# Altium PCB PCB - Christopher.PcbDoc
Units mil, origin at the board's own origin, x right, y up, seen from the top; angles counter-clockwise.
Board outline 6000 x 4000 mil, 2 copper layers (Top Layer, Bottom Layer); 65 components, 42 nets, 221 pads, 0 vias.
Unrouted connection lines stored in the file: 113.
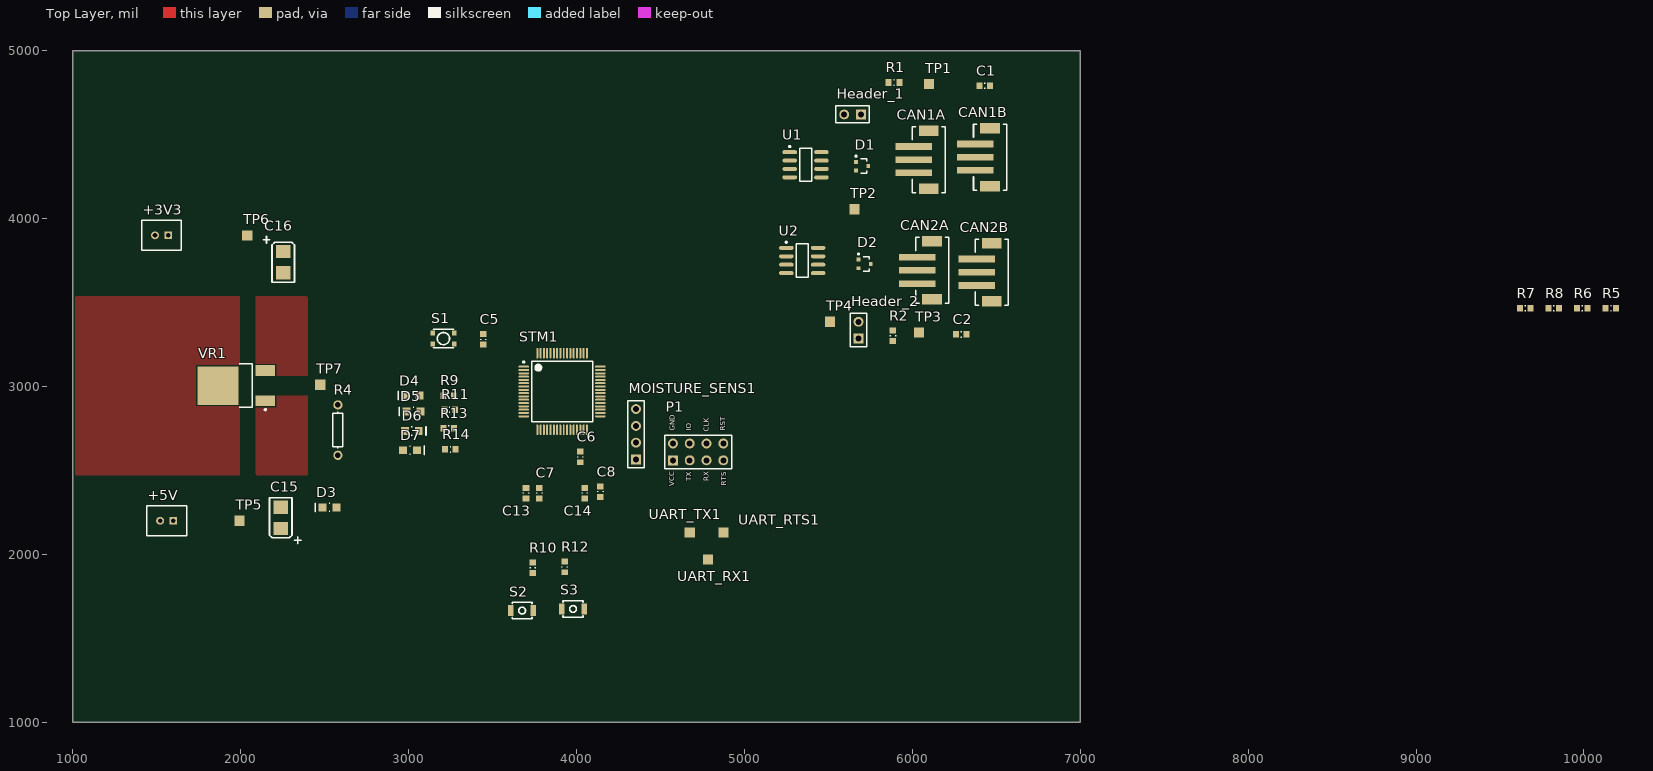
[diagram p0: Top Layer view]
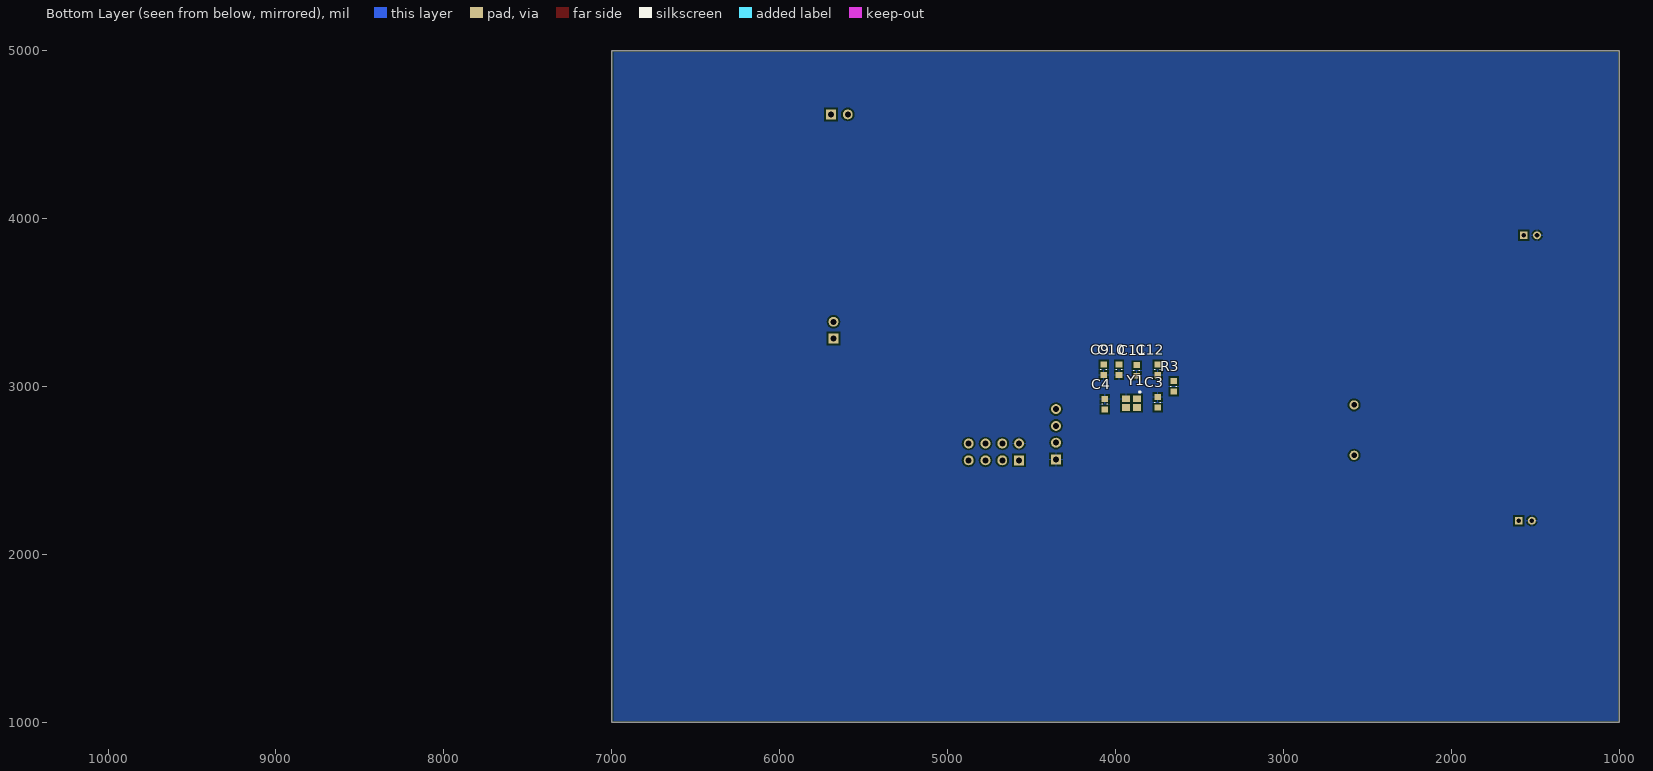
[diagram p1: Bottom Layer view, seen from below]

## Layer stack, top to bottom
Top Solder: solder mask 0.4, Solder Resist, Dk 3.5
Top Layer: signal copper 1.4
Dielectric 1: dielectric 12.6, FR-4, Dk 4.8
Bottom Layer: signal copper 1.4
Bottom Solder: solder mask 0.4, Solder Resist, Dk 3.5

## Board outline
1000,1000 7000,1000 7000,5000 1000,5000

## Design rules (kind name [scope] priority, off if disabled: settings)
BoardOutlineClearance [All] p1: gap=10 ignorepadtopadclearanceinfootprint=FALSE except(0: Arc-SplitContinuation Track-SplitContinuation SMDPad-SplitContinuation THPad-SplitContinuation Via-SplitContinuation Fill-SplitContinuation Poly-SplitContinuation Region-SplitContinuation Text-SplitContinuation)
Clearance [All] p1: gap=10 ignorepadtopadclearanceinfootprint=FALSE except(0: Arc-Hole Track-Hole SMDPad-Hole THPad-Hole Via-Hole Fill-Hole Poly-Hole Region-Hole Text-Hole; 5: SMDPad-SMDPad; 6: Arc-Arc Arc-Track Arc-SMDPad Track-Track Track-SMDPad)
PolygonConnect [All] p1: connectstyle=Relief reliefconductorwidth=10 reliefentries=4 polygonreliefangle="90 Angle" airgapwidth=10
RoomDefinition Support [InComponentClass('Support')] p1: confinementstyle=ConfineIn formatcopy=TRUE lockcomponents=FALSE outline 7045,3365 11820,3365 11820,3605 7045,3605
RoomDefinition POWER [InComponentClass('POWER')] p2: confinementstyle=ConfineIn formatcopy=TRUE lockcomponents=FALSE outline 7045,2735 8955,2735 8955,3320 7045,3320
RoomDefinition MCU [InComponentClass('MCU')] p3: confinementstyle=ConfineIn formatcopy=TRUE lockcomponents=FALSE outline 7045,2045 10425,2045 10425,2685 7045,2685
RoomDefinition Connectors [InComponentClass('Connectors')] p4: confinementstyle=ConfineIn formatcopy=TRUE lockcomponents=FALSE outline 7045,1450 10335,1450 10335,1990 7045,1990
RoomDefinition CAN [InComponentClass('CAN')] p5: confinementstyle=ConfineIn formatcopy=TRUE lockcomponents=FALSE outline 7045,1060 10655,1060 10655,1405 7045,1405
RoutingVias [All] p1: holewidth=28 width=50 viastyle="Through Hole" minholewidth=28 minwidth=50 maxholewidth=28 maxwidth=50
SolderMaskExpansion [All] p1: expansion=4
Width [All] p1: maxlimit=10 minlimit=10 preferedwidth=10
30 further rules are at their usual default settings.

## Classes and differential pairs
component class Support: D4 D5 D6 D7 R5 R6 R7 R8 R9 R10 R11 R12 R13 R14 S2 S3 UART_RTS UART_RTS1 UART_RX UART_RX1 UART_TX UART_TX1
component class Power: C15 C16 D3 R4 TP5 TP6 TP7 VR1
component class MCU: C3 C4 C5 C6 C7 C8 C13 C14 R3 S1 STM1 Y1
component class Connectors: +3V3 +5V CAN1A CAN1B CAN2A CAN2B MOISTURE_SENS1 P1
component class CAN: C1 C2 D1 D2 Header_1 Header_2 R1 R2 TP1 TP2 TP3 TP4 U1 U2

## Components (designator, comment, footprint, x,y, rotation, side; value= is the part's Value field where it differs from the comment)
+3V3 "CON_2M" JST-B2B-PHSK 1530,3900 r180 top
+5V "CON_2M" JST-B2B-PHSK 1560.63,2200 r180 top
C1 "CAP_0.1uF_16V_0603" CAPC0603(1608)55_N 6431.5,4790 r0 top value=0.1uF
C2 "CAP_0.1uF_16V_0603" CAPC0603(1608)55_N 6291.5,3310 r0 top value=0.1uF
C3 "CAP_15pF_0603" CAPC0603(1608)55_N 3750,2904.87 r270 bottom value=15pF
C4 "CAP_15pF_0603" CAPC0603(1608)55_N 4065,2894.41 r270 bottom value=15pF
C5 "CAP_0.1uF_16V_0603" CAPC0603(1608)55_N 3445,3280 r270 top value=0.1uF
C6 "CAP_4.7uF_0603" CAPC0603(1608)55_N 4023.27,2580 r90 top value=4.7uF
C7 "CAP_0.1uF_16V_0603" CAPC0603(1608)55_N 3780,2365 r90 top value=0.1uF
C8 "CAP_1uF_16V_0603" CAPC0603(1608)55_N 4143.35,2373.5 r90 top value=1uF
C9 "CAP_0.1uF_16V_0603" CAPC0603(1608)55_N 4071.73,3100 r90 bottom value=0.1uF
C10 "CAP_0.1uF_16V_0603" CAPC0603(1608)55_N 3980,3100 r90 bottom value=0.1uF
C11 "CAP_0.1uF_16V_0603" CAPC0603(1608)55_N 3875,3095 r90 bottom value=0.1uF
C12 "CAP_4.7uF_0603" CAPC0603(1608)55_N 3750,3100 r90 bottom value=4.7uF
C13 "CAP_0.1uF_16V_0603" CAPC0603(1608)55_N 3700,2365 r90 top value=0.1uF
C14 "CAP_10nF_0603" CAPC0603(1608)55_N 4050,2365 r90 top value=10nF
C15 "CAP_10uF_1411_POL" AVX-CAPC3528_V 2240,2217.01 r90 top value=10uF
C16 "CAP_10uF_1411_POL" AVX-CAPC3528_V 2255,3740 r270 top value=10uF
CAN1A "CON_3M" JST-B3B-SM4-TB 6197.01,4350 r90 top
CAN1B "CON_3M" JST-B3B-SM4-TB 6562.01,4365 r90 top
CAN2A "CON_3M" JST-B3B-SM4-TB 6217.01,3691.26 r90 top
CAN2B "CON_3M" JST-B3B-SM4-TB 6572.01,3680 r90 top
D1 "TVS_DIODE_CAN" NXP-SOT323-3 5701.42,4311.85 r0 top
D2 "TVS_DIODE_CAN" NXP-SOT323-3 5716.42,3729.41 r0 top
D3 "DIO_LED_G" LED_0805_LINE 2530,2280 r180 top
D4 "DIO_LED_Y" LED_0805_LINE 3025,2945 r180 top
D5 "DIO_LED_G" LED_0805_LINE 3030,2850 r180 top
D6 "DIO_LED_G" LED_0805_LINE 3020,2735 r0 top
D7 "DIO_LED_G" LED_0805_LINE 3010,2620 r0 top
Header_1 "JUMPER_2" HDR1X2 5695,4620 r180 top
Header_2 "JUMPER_2" HDR1X2 5680,3285 r90 top
MOISTURE_SENS1 "JST 4-PH" HDR1X4 4355,2565 r90 top
P1 "HEADER 4X2" HEADER_2X4 4575,2560 r0 top
R1 "RES_120R_0603" RESC0603(1608)_N 5891.5,4810 r180 top value=120R
R2 "RES_120R_0603" RESC0603(1608)_N 5885,3301.5 r270 top value=120R
R3 "RES_0R_0603" RESC0603(1608)_N 3655,3000 r270 bottom value=0R
R4 "" AXIAL-0.3 2580,2740 r90 top value=100R
R5 "RES_10K_0603" RESC0603(1608)_N 10160,3465 r0 top value=10K
R6 "RES_10K_0603" RESC0603(1608)_N 9990,3465 r0 top value=10K
R7 "RES_4K7_0603" RESC0603(1608)_N 9650,3465 r0 top value=4K7
R8 "RES_4K7_0603" RESC0603(1608)_N 9820,3465 r0 top value=4K7
R9 "RES_100R_0603" RESC0603(1608)_N 3240,2945 r180 top value=100R
R10 "RES_10K_0603" RESC0603(1608)_N 3740,1920 r270 top value=10K
R11 "RES_100R_0603" RESC0603(1608)_N 3245,2861.73 r180 top value=100R
R12 "RES_10K_0603" RESC0603(1608)_N 3930,1925 r90 top value=10K
R13 "RES_100R_0603" RESC0603(1608)_N 3240,2750 r180 top value=100R
R14 "RES_100R_0603" RESC0603(1608)_N 3250,2625 r180 top value=100R
S1 "SW_PWR" PTS830GM140 3208.5,3285 r0 top
S2 "SW_TACTILE" B3U-1100P 3677.01,1665 r180 top
S3 "SW_TACTILE" B3U-1100P 3980,1675 r0 top
STM1 "STM32F446RET6" STM-LQFP64_L 3915,2970 r0 top locked
TP1 "CAN1H" TESTPOINT 6100,4800 r0 top
TP2 "CAN1L" TESTPOINT 5655,4055 r90 top
TP3 "CAN2H" TESTPOINT 6040,3320 r90 top
TP4 "CAN2L" TESTPOINT 5510,3385 r90 top
TP5 "+5V" TESTPOINT 1994.8,2200 r90 top
TP6 "+3V3" TESTPOINT 2040,3900 r90 top
TP7 "GND" TESTPOINT 2475,3010 r90 top
U1 "IC TXRX CAN" LT-S8_N 5365,4320 r0 top
U2 "IC TXRX CAN" LT-S8_N 5345,3750 r0 top
UART_RTS1 "TESTPOINT" TESTPOINT 4875,2130 r90 top
UART_RX1 "TESTPOINT" TESTPOINT 4785,1970 r90 top
UART_TX1 "TESTPOINT" TESTPOINT 4675,2130 r90 top
VR1 "5V0_3V3_LDO" VOLTAGE_REGULATOR 2037.83,3005 r90 top
Y1 "CRYSTAL_32MHZ" AVX-CX2520DB32000D0GEJZ1-4_V 3905,2900.32 r270 bottom

## Footprints (in the part's own frame and the unit in brackets; to place one, negate y for a bottom-side part, rotate by r counter-clockwise, add the part's x,y. Pads: shape width x height; smd on the part's side, far side on the other; paste and mask are expansions set on the pad)
AVX-CAPC3528_V [mm] "SMT Capacitor, 2 Leads, Body 3.5x2.8mm"
  rect 2x2.2 smd: 1(-1.6,0) 2(1.6,0)
  silkscreen extent -3.87,-3.05 3.05,1.7, body extent -1.79,-1.54 1.8,1.54, height 1.9
AVX-CX2520DB32000D0GEJZ1-4_V [mm] "Hand Drawn, 4-Leads,Body 2.5x2mm"
  rect 1x1.2 smd: 1(-0.65,0.85) 2(-0.65,-0.85) 3(0.65,-0.85) 4(0.65,0.85)
  silkscreen extent -1.82,1.13 -1.58,1.38, body extent -1,-1.25 1,1.25, height 0.55
AXIAL-0.3 [mm] "Axial Device, Thru-Hole; 2 Leads; 0.3 in Pin Spacing"
  round 1.4 hole 0.85: 1(-3.81,0) 2(3.81,0)
  silkscreen extent -2.77,-0.76 2.77,0.76
B3U-1100P [mm] "TACTILE SWITCH GREY"
  rect 0.8x1.7 smd: 1(-1.7,0) 2(1.7,0)
  silkscreen extent -1.5,-1.25 1.5,1.25
CAPC0603(1608)55_N [mm] "Chip Capacitor, Body 1.6x0.8mm, Height 0.55mm, IPC Medium Density"
  rect 0.9x1 smd: 1(-0.8,0) 2(0.8,0)
  silkscreen extent -0.05,-0.4 0.05,0.4, body extent -0.87,-0.48 0.88,0.47, height 0.55
HDR1X2 [mm] "Connector; Header; 2 Position"
  rect 1.5x1.5 hole 0.9: 1(0,0)
  round 1.5 hole 0.9: 2(2.54,0)
  silkscreen extent -1.27,-1.27 3.81,1.27
HDR1X4 [mm] "Connector; Header; 4 Position"
  rect 1.5x1.5 hole 0.9: 1(0,0)
  round 1.5 hole 0.9: 2(2.54,0) 3(5.08,0) 4(7.62,0)
  silkscreen extent -1.27,-1.27 8.89,1.27
HEADER_2X4 [mm]
  rect 1.5x1.5 hole 0.9: 1(0,0)
  round 1.5 hole 0.9: 2(2.54,0) 3(5.08,0) 4(7.62,0) 5(0,2.54) 6(2.54,2.54) 7(5.08,2.54) 8(7.62,2.54)
  silkscreen extent -1.27,-1.27 8.89,3.81
JST-B2B-PHSK [mm]
  rect 1.162x1.162 / inner rect 1.524x1.524 / far side rect 1.162x1.162 hole 0.7: 1(-1,0)
  round 1.2 / inner round 1.524 / far side round 1.2 hole 0.7: 2(1,0)
  silkscreen extent -3,-2.25 3,2.25
JST-B3B-SM4-TB [mm]
  rect 1x5.5 smd: 1(-2,4.75) 2(0,4.75) 3(2,4.75)
  rect 1.6x3 smd: 4(-4.4,2.5) 5(4.4,2.5)
  silkscreen extent -5,0 5,5
LED_0805_LINE [mm] "SMD, 2-Leads, Body 2x1.25mm"
  rect 1.2x1.2 smd: 1(-1.05,0) 2(1.05,0)
  silkscreen extent -0.05,-0.63 2.16,0.64, body extent -1,-0.63 1,0.63, height 0.8
LT-S8_N [mm] "SOP, 8-Leads, Body 4.9x3.9mm, Pitch 1.27mm, IPC Medium Density"
  oval 2.2x0.6 smd: 1(-2.4,1.905) 2(-2.4,0.635) 3(-2.4,-0.635) 4(-2.4,-1.905) 5(2.4,-1.905) 6(2.4,-0.635) 7(2.4,0.635) 8(2.4,1.905)
  silkscreen extent -2.52,-2.5 0.9,2.88, body extent -2,-2.5 2,2.5, height 1.76
NXP-SOT323-3 [mm] "SOT23, 3-Leads, Body 2.2x1.35mm, Pitch 0.65mm"
  rect 0.55x0.6 smd paste-1: 1(-0.925,0.65) 2(-0.925,-0.65) 3(0.925,0)
  silkscreen extent -1.05,-1.1 0.67,1.62, body extent -1.15,-1.1 1.15,1.1, height 1.1
PTS830GM140 [mm] "PWR TACTILE SWITCH (RED)"
  rect 0.7x0.75 smd: 1(-1.625,0.825) 2(1.625,0.825) 3(-1.625,-0.825) 4(1.625,-0.825)
  silkscreen extent -1.53,-1.4 1.53,1.4
RESC0603(1608)_N [mm] "Chip Resistor, Body 1.6x0.8mm, IPC Medium Density"
  rect 0.9x1 smd: 1(-0.8,0) 2(0.8,0)
  silkscreen extent -0.05,-0.4 0.05,0.4, body extent -0.85,-0.47 0.85,0.47, height 0.6
STM-LQFP64_L [mm] "QFP, 64-Leads, Body 10x10mm, Pitch 0.5mm, IPC High Density"
  oval 1.6x0.3 smd: 1(-5.8,3.75) 2(-5.8,3.25) 3(-5.8,2.75) 4(-5.8,2.25) 5(-5.8,1.75) 6(-5.8,1.25) 7(-5.8,0.75) 8(-5.8,0.25) 9(-5.8,-0.25) 10(-5.8,-0.75) 11(-5.8,-1.25) 12(-5.8,-1.75) 13(-5.8,-2.25) 14(-5.8,-2.75) 15(-5.8,-3.25) 16(-5.8,-3.75) 33(5.8,-3.75) 34(5.8,-3.25) 35(5.8,-2.75) 36(5.8,-2.25) 37(5.8,-1.75) 38(5.8,-1.25) 39(5.8,-0.75) 40(5.8,-0.25) 41(5.8,0.25) 42(5.8,0.75) 43(5.8,1.25) 44(5.8,1.75) 45(5.8,2.25) 46(5.8,2.75) 47(5.8,3.25) 48(5.8,3.75)
  oval 0.3x1.6 smd: 17(-3.75,-5.8) 18(-3.25,-5.8) 19(-2.75,-5.8) 20(-2.25,-5.8) 21(-1.75,-5.8) 22(-1.25,-5.8) 23(-0.75,-5.8) 24(-0.25,-5.8) 25(0.25,-5.8) 26(0.75,-5.8) 27(1.25,-5.8) 28(1.75,-5.8) 29(2.25,-5.8) 30(2.75,-5.8) 31(3.25,-5.8) 32(3.75,-5.8) 49(3.75,5.8) 50(3.25,5.8) 51(2.75,5.8) 52(2.25,5.8) 53(1.75,5.8) 54(1.25,5.8) 55(0.75,5.8) 56(0.25,5.8) 57(-0.25,5.8) 58(-0.75,5.8) 59(-1.25,5.8) 60(-1.75,5.8) 61(-2.25,5.8) 62(-2.75,5.8) 63(-3.25,5.8) 64(-3.75,5.8)
  silkscreen extent -5.92,-4.6 4.6,4.6, body extent -5,-5 5,5, height 1.6
TESTPOINT [mil]
  rect 60x60 smd: 1(0,0)
VOLTAGE_REGULATOR [mm] "DPAK, 3-Leads, Body 6.095x6.54mm, Pitch 4.57mm"
  rect 1.6x3 smd: 1(-2.285,-2.79) 3(2.285,-2.79)
  rect 5.8x6.2 smd: 2(0,4.39)
  silkscreen extent -3.76,-2.92 3.27,1.14, body extent -3.27,-0.84 3.27,5.25, height 2.38

## Part data
C1 C2 C5 C7 C9 C10 C11 C13: "CAP CER 0.1UF 16V X7R 0603", Digikey Part Number=311-1088-1-ND, Manufacturer=Yageo, MPN=CC0603KRX7R7BB104, Package="0603 (1608 Metric)", Temperature Coefficient=X7R, Voltage Rating=16V, Dimensions="0.063\" L x 0.031\" W (1.60mm x 0.80mm)"
C3 C4: "CAP CER 15PF 250V NPO 0603", Digikey Part Number=311-3282-1-ND, Manufacturer=Yageo, MPN=AC0603JRNPOYBN150, Package="0603 (1608 Metric)", Temperature Coefficient=NP0, Voltage Rating=250v, Dimensions="0.063\" L x 0.031\" W (1.60mm x 0.80mm)"
C6 C12: "CAP CER 4.7UF 6.3V X5R 0603", Digikey Part Number=311-1521-1-ND, Manufacturer=Yageo, MPN=CC0603KRX5R5BB475, Package="0603 (1608 Metric)", Temperature Coefficient=X5R, Voltage Rating=6.3V, Dimensions="0.063\" L x 0.031\" W (1.60mm x 0.80mm)"
C8: "CAP CER 1UF 16V Y5V 0603", Digikey Part Number=311-1372-1-ND, Manufacturer=Yageo, MPN=CC0603ZRY5V7BB105, Package="0603 (1608 Metric)", Temperature Coefficient=Y5V, Voltage Rating=16V, Dimensions="0.063\" L x 0.031\" W (1.60mm x 0.80mm)"
C14: "CAP CER 10000PF 16V X7R 0603", Digikey Part Number=311-3369-1-ND, Manufacturer=Yageo, MPN=CC0603KRX7R7BB103, Package="0603 (1608 Metric)", Temperature Coefficient=X7R, Voltage Rating=16V, Dimensions="0.063\" L x 0.031\" W (1.60mm x 0.80mm)"
C15 C16: "CAP TANT 10UF 20% 10V 1411", Digikey Part Number=478-12047-1-ND, Manufacturer="AVX Corporation", MPN=F971A106MBAHT3, Package="1411 (3528 Metric)", Voltage Rating=10V, Dimensions="0.063\" L x 0.031\" W (1.60mm x 0.80mm)"
D1 D2: "TVS DIODE 24V 41V SOT323-3", Digikey Part Number=1727-3891-1-ND, Manufacturer="Nexperia USA Inc.", MPN=PESD2CAN,215, Package="SC-70, SOT-323", ComponentLink1Description=Datasheet, ComponentLink1URL=https://assets.nexperia.com/documents/data-sheet/PESD1CAN-U.pdf
D3 D5 D6 D7: "LED GREEN DIFFUSED 0805 SMD", Digikey Part Number=475-1410-1-ND, Forward Voltage Drop=2.2V, Manufacturer=OSRAM, MPN="LG R971-KN-1", Package="0805 (2012 Metric)"
D4: "LED YELLOW DIFFUSED 0805 SMD", Digikey Part Number=475-2560-1-ND, Forward Voltage Drop=2.2V, Manufacturer=OSRAM, MPN="LY R976-PS-36", Package="0805 (2012 Metric)"
Header_1 Header_2: "HEADER 2X1"
MOISTURE_SENS1: library part "Header 4", "Header, 4-Pin", LatestRevisionDate=17-Jul-2002, LatestRevisionNote="Re-released for DXP Platform.", Publisher="Altium Limited"
P1: "Header, 4-Pin Dual row", Digikey Part Number=S9015E-04-ND, Manufacturer="Sullins Connector Solutions", MPN=GRPB042VWVN-RC
R1 R2: "RES SMD 120 OHM 5% 1/10W 0603", Digikey Part Number=311-120GRCT-ND, Manufacturer=Yageo, MPN=RC0603JR-07120RL, Package="0603 (1608 Metric)", Tolerance=5%, Dimensions="0.063\" L x 0.031\" W (1.60mm x 0.80mm)"
R3: "RES SMD 0 OHM JUMPER 1/10W 0603", Digikey Part Number=311-0.0GRCT-ND, Manufacturer=Yageo, MPN=RC0603JR-070RL, Package="0603 (1608 Metric)", Dimensions="0.063\" L x 0.031\" W (1.60mm x 0.80mm)"
R4: library part Res1, "Resistor", LatestRevisionDate=17-Jul-2002, LatestRevisionNote="Re-released for DXP Platform.", PackageDescription="Axial Device, Thru-Hole; 2 Leads; 0.3 in Pin Spacing", PackageReference=AXIAL-0.3, Published=8-Jun-2000, Publisher="Altium Limited"
R5 R6 R10 R12: "RES SMD 10K OHM 5% 1/10W 0603", Digikey Part Number=311-10KGRCT-ND, Manufacturer=Yageo, MPN=RC0603JR-0710KL, Package="0603 (1608 Metric)", Tolerance=5%, Dimensions="0.063\" L x 0.031\" W (1.60mm x 0.80mm)"
R7 R8: "RES SMD 4.7K OHM 5% 1/10W 0603", Digikey Part Number=311-4.7KGRCT-ND, Manufacturer=Yageo, MPN=RC0603JR-074K7L, Package="0603 (1608 Metric)", Tolerance=5%, Dimensions="0.063\" L x 0.031\" W (1.60mm x 0.80mm)"
R9 R11 R13 R14: "RES SMD 100 OHM 1% 1/10W 0603", Digikey Part Number=311-100HRCT-ND, Manufacturer=Yageo, MPN=RC0603FR-07100RL, Package="0603 (1608 Metric)", Tolerance=1%, Dimensions="0.063\" L x 0.031\" W (1.60mm x 0.80mm)"
S1: "Power Switch (Red)", Digikey Part Number=CKN10587CT-ND, Manufacturer=C&K, MPN="PTS830GM140 SMTR LFS", ComponentLink1Description=Datasheet, ComponentLink1URL=https://www.ckswitches.com/media/1478/pts830.pdf
S2 S3: "Tactile Switch (Grey)", Digikey Part Number=SW1021TR-ND, Manufacturer="Omron Electronics Inc-EMC Div", MPN=B3U-1100P
STM1: library part MCU_STM32F446RET6, "ARM Cortex-M4 32-bit MCU+FPU, 512 KB Flash, 128 KB Internal RAM, 50 I/Os, 64-Pin LQFP, -40 to 85 degC, Tray", I/Os (High Current)=50, Operating Frequency(F) (Processor speed) (MHz)=180, Package Description=LQFP64, Package Reference="64-Pin Low-profile Quad Flat Package, Body 10 x 10 mm, Pitch 0.5 mm", Supply Voltage(Vcc) min (V)=1.7, ComponentLink1Description="Manufacturer URL", ComponentLink1URL=http://www.st.com/, ComponentLink2Description=Datasheet, ComponentLink2URL=http://www.st.com/st-web-ui/static/active/en/resource/technical/document/datasheet/DM00141306.pdf, Core="ARM Cortex-M4", D/A Converter=2, DatasheetVersion="Rev. 6", FLASH Size (Prog) (kB)=512, Internal RAM Size (kB)=128, Mounting Technology="Surface Mount", Packing=Tray
TP1 TP2 TP3 TP4 TP5 TP6 TP7: library part TESTPOINT_SMD, "TESTPOINT_SMD"
U1 U2: library part LTC2875, "IC TXRX CAN 4MBPS 8SO", Digikey Part Number=LTC2875IS8#PBF-ND, Manufacturer="Linear Technologies", MPN=LTC2875IS8#PBF, Package="8-SOIC (0.154\", 3.90mm Width)", ComponentLink1Description=Datasheet, ComponentLink1URL=https://www.analog.com/media/en/technical-documentation/data-sheets/2875f.pdf
VR1: "IC REG LINEAR 3.3V 1A DPAK", Current Output=1A, Manufacturer="ON Semiconductor", Part Number=NCP1117DT33T5G
Y1: "CRYSTAL 32MHZ 8PF SMD", Digikey Part Number=1253-1730-1-ND, Manufacturer="Kyocera International Inc. Electronic Components", MPN=CX2520DB32000D0GPSC1, Package="4-SMD, No Lead", Dimensions="0.098\" L x 0.079\" W (2.50mm x 2.00mm)"

## Nets (pads, with @x,y where several pads share a name; then routed paths per layer and width w, separated by ;. In a path a pad name is that pad's centre, name@x,y a point inside that pad or via, vN(x,y) a via of type N, cw(c..) or ccw(c..) an arc to the next point about the centre after c; other vN are vias at no path point)
+3V3: +3V3.1 C1.2 C2.2 C7.2 C8.2 C9.2 C10.2 C11.2 C12.2 C13.2 C14.2 C16.1 MOISTURE_SENS1.2 P1.1 R4.2 R5.2 R7.2 R8.2 R10.1 R12.2 TP6.1 U1.3 U2.3 VR1.3
+5V: +5V.1 C15.1 TP5.1 VR1.1
GND: +3V3.2 +5V.2 C1.1 C2.1 C3.1 C4.1 C5.1 C6.1 C7.1 C8.1 C9.1 C10.1 C11.1 C12.1 C13.1 C14.1 C15.2 C16.2 CAN1A.3 CAN1B.3 CAN2A.3 CAN2B.3 D1.3 D2.3 D3.2 D4.2 D5.2 D6.2 D7.2 MOISTURE_SENS1.1 P1.5 R6.1 S1.1 S2.2 S3.2 TP7.1 U1.2 U1.8 U2.2 U2.8 VR1.2 Y1.2
NetC3_2: C3.2 R3.2 Y1.1
NetC4_2: C4.2 STM1.5 Y1.3
NetC5_2: C5.2 P1.8 S1.4 STM1.7
NetC6_2: C6.2 STM1.30
NetCAN1A_1: CAN1A.1 CAN1B.1
NetCAN1A_2: CAN1A.2 CAN1B.2
NetCAN2A_1: CAN2A.1 CAN2B.1
NetCAN2A_2: CAN2A.2 CAN2B.2
NetD1_1: D1.1 R1.1 TP1.1 U1.7
NetD1_2: D1.2 Header_1.2 TP2.1 U1.6
NetD2_1: D2.1 R2.1 TP3.1 U2.7
NetD2_2: D2.2 Header_2.2 TP4.1 U2.6
NetD3_1: D3.1 R4.1
NetD4_1: D4.1 R9.2
NetD5_1: D5.1 R11.2
NetD6_1: D6.1 R13.2
NetD7_1: D7.1 R14.2
NetHeader_1_1: Header_1.1 R1.2
NetHeader_2_1: Header_2.1 R2.2
NetMOISTURE_SENS1_3: MOISTURE_SENS1.3 R7.1 STM1.40
NetMOISTURE_SENS1_4: MOISTURE_SENS1.4 R8.1 STM1.41
NetP1_2: P1.2 STM1.51 UART_TX1.1
NetP1_3: P1.3 STM1.52 UART_RX1.1
NetP1_4: P1.4 STM1.50 UART_RTS1.1
NetP1_6: P1.6 STM1.46
NetP1_7: P1.7 STM1.49
NetR3_1: R3.1 STM1.6
NetR5_1: R5.1
NetR6_2: R6.2
NetR9_1: R9.1 STM1.8
NetR10_2: R10.2 S2.1 STM1.26
NetR11_1: R11.1 STM1.9
NetR12_1: R12.1 S3.1 STM1.27
NetR13_1: R13.1 STM1.10
NetR14_1: R14.1 STM1.11
NetSTM1_33: STM1.33 U2.4
NetSTM1_34: STM1.34 U2.1
NetSTM1_44: STM1.44 U1.4
NetSTM1_45: STM1.45 U1.1
pads on no net: CAN1A.4 CAN1A.5 CAN1B.4 CAN1B.5 CAN2A.4 CAN2A.5 CAN2B.4 CAN2B.5 S1.2 S1.3 STM1.1 STM1.2 STM1.3 STM1.4 STM1.12 STM1.13 STM1.14 STM1.15 STM1.16 STM1.17 STM1.18 STM1.19 STM1.20 STM1.21 STM1.22 STM1.23 STM1.24 STM1.25 STM1.28 STM1.29 STM1.31 STM1.32 STM1.35 STM1.36 STM1.37 STM1.38 STM1.39 STM1.42 STM1.43 STM1.47 STM1.48 STM1.53 STM1.54 STM1.55 STM1.56 STM1.57 STM1.58 STM1.59 STM1.60 STM1.61 STM1.62 STM1.63 STM1.64 U1.5 U2.5 Y1.4

## Polygon pours and split planes (outlines as drawn)
GND on Bottom Layer "Ground Pour" (solid, pour order 20): 420,5560 505,5475 7620,5475 7345,5200 7345,595 7335,605 670,605
no net on Bottom Layer "Bottom Layer-No Net 1" (solid, pour order 2): 0,5440
no net on Top Layer "Top Layer-No Net 2" (solid, pour order 22): 1019.8,3537.5 1014.8,3532.5 1014.8,2477.5 1019.8,2472.5 1994.8,2472.5 1994.8,3537.5
no net on Top Layer "Top Layer-No Net 1" (solid, pour order 30): 2400,3065 2400,3530 2392.5,3537.5 2090,3537.5 2090,3065
no net on Top Layer "Top Layer-No Net" (solid, pour order 28): 2805,2585
no net on Top Layer "Top Layer-No Net 1" (solid, pour order 26): 2090,2945 2090,2480 2097.5,2472.5 2400,2472.5 2400,2945

## Text inside footprints (layer, text, board x,y; h text height)
P1: Top Overlay "TX" at 4685.24,2435.91 h30 r90; Top Overlay "RX" at 4787.6,2435.91 h30 r90; Top Overlay "RTS" at 4893.9,2407.28 h30 r90; Top Overlay "IO" at 4685.24,2735.04 h30 r90; Top Overlay "CLK" at 4787.6,2731.1 h30 r90; Top Overlay "RST" at 4886.81,2735.04 h30 r90; Top Overlay "VCC" at 4582.87,2404.33 h30 r90; Top Overlay "GND" at 4586.81,2735.04 h30 r90